# Altium PCB PCB_mini.PcbDoc
Units mm, origin at the board's own origin, x right, y up, seen from the top; angles counter-clockwise.
Board outline 170.49 x 71.77 mm, 2 copper layers (Top Layer, Bottom Layer); 52 components, 61 nets, 200 pads, 16 vias.
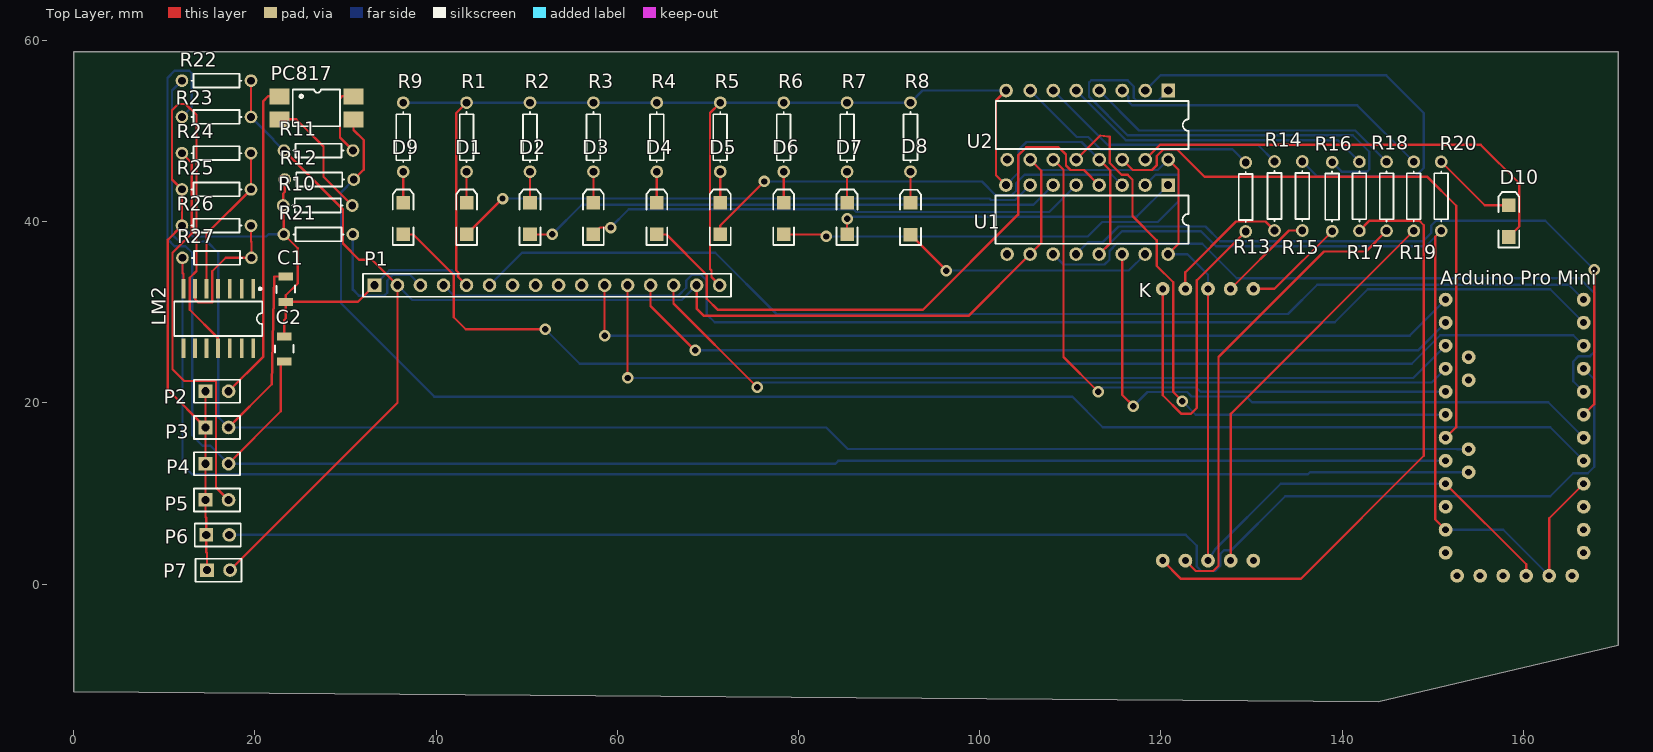
[diagram p0: Top Layer view]
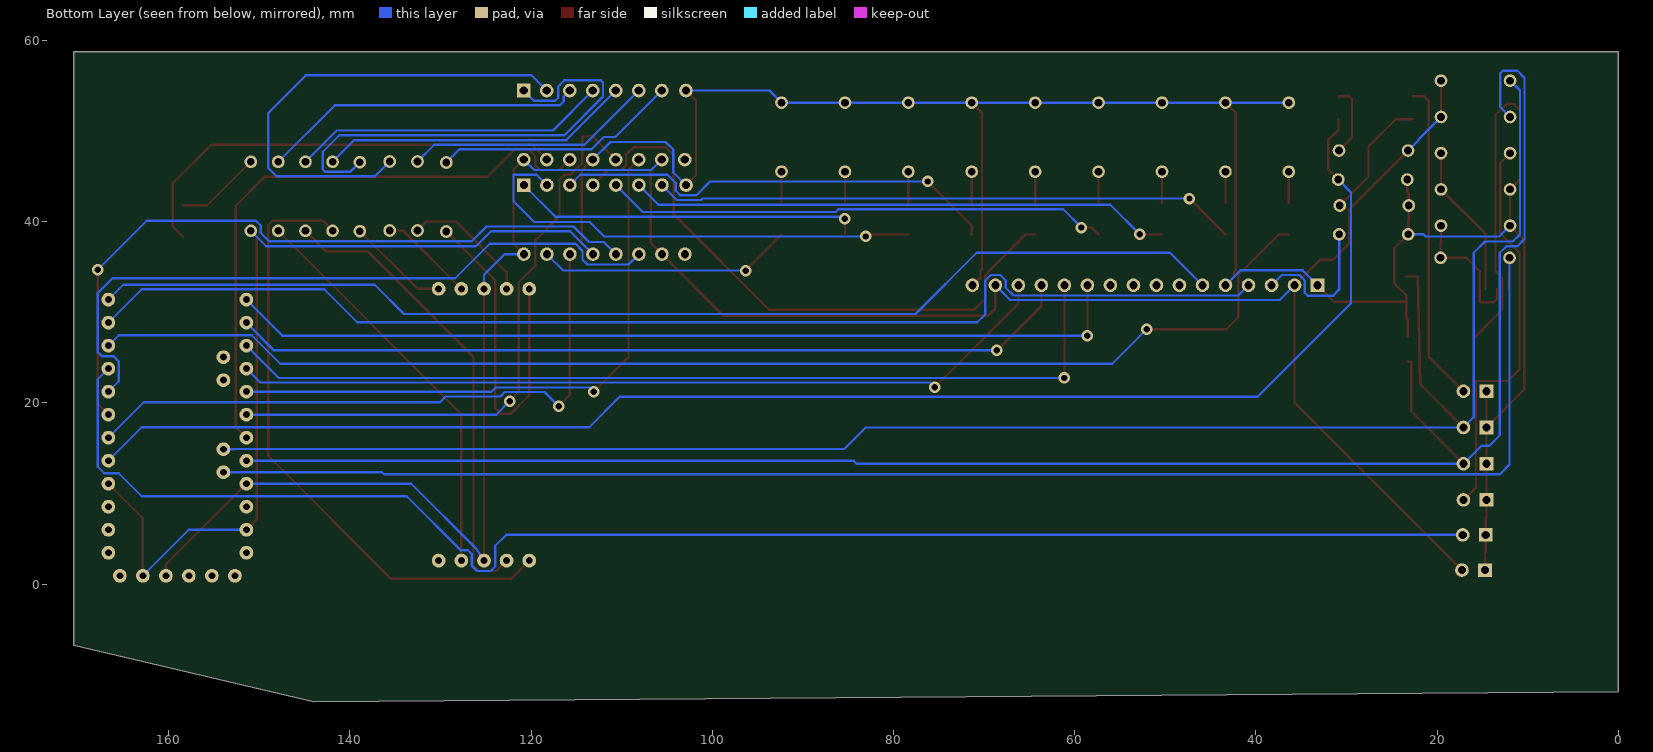
[diagram p1: Bottom Layer view, seen from below]

## Layer stack, top to bottom
Top Solder: solder mask 0.0102, Solder Resist, Dk 3.5
Top Layer: signal copper 0.0356
Dielectric 1: dielectric 0.32, FR-4, Dk 4.8
Bottom Layer: signal copper 0.0356
Bottom Solder: solder mask 0.0102, Solder Resist, Dk 3.5

## Board outline
0,-11.866 0,58.769 170.488,58.769 170.488,-6.739 144,-13

## Design rules (kind name [scope] priority, off if disabled: settings)
Clearance [All] p1: gap=0.254
PolygonConnect [All] p1: connectstyle=Relief reliefconductorwidth=0.254 reliefentries=4 polygonreliefangle="90 Angle" airgapwidth=0.254
RoutingVias [All] p1: holewidth=0.711 width=1.27 viastyle="Through Hole" minholewidth=0.711 minwidth=1.27 maxholewidth=0.711 maxwidth=1.27
SolderMaskExpansion [All] p1: expansion=0.102
Width [All] p1: maxlimit=0.254 minlimit=0.254 preferedwidth=0.254
30 further rules are at their usual default settings.

## Components (designator, comment, footprint, x,y, rotation, side; value= is the part's Value field where it differs from the comment)
"Arduino Pro Mini" "Atmel Atmega328p" ArduinoProMini 166.675,16.167 r90 top
C1 "Cap" "1206 footprint" 23.407,31.55 r90 top
C2 "Cap" "1206 footprint" 23.239,26.981 r270 top
D1 "LED2" 3.2X1.6X1.1 43.362,40.355 r90 top
D2 "LED2" 3.2X1.6X1.1 50.362,40.355 r90 top
D3 "LED2" 3.2X1.6X1.1 57.362,40.355 r90 top
D4 "LED2" 3.2X1.6X1.1 64.362,40.355 r90 top
D5 "LED2" 3.2X1.6X1.1 71.362,40.355 r90 top
D6 "LED2" 3.2X1.6X1.1 78.362,40.355 r90 top
D7 "LED2" 3.2X1.6X1.1 85.362,40.355 r90 top
D8 "LED2" 3.2X1.6X1.1 92.362,40.336 r90 top
D9 "LED2" 3.2X1.6X1.1 36.362,40.355 r90 top
D10 "LED2" 3.2X1.6X1.1 158.41,40.074 r90 top
K "KING_BRIGHT" KNIGHT_BRIGHT 113.208,0.601 r0 top
LM2 "LM324" SOP-14 17.628,29.418 r180 top
P1 "LCD" HDR1X16 33.192,33 r0 top
P2 "Camshaft signal" HDR1X2 14.542,21.297 r0 top
P3 "Oil level" HDR1X2 14.542,17.297 r0 top
P4 "Water heat" HDR1X2 14.542,13.297 r0 top
P5 "Hledslukassi" HDR1X2 14.542,9.297 r0 top
P6 "Gear" HDR1X2 14.63,5.437 r0 top
P7 "Power" HDR1X2 14.709,1.545 r0 top
PC817 "PC817" "PC817 SMT" 22.702,51.309 r0 top
R1 "Res1" AXIAL-0.3 43.362,49.341 r90 top
R2 "Res1" AXIAL-0.3 50.362,49.341 r90 top
R3 "Res1" AXIAL-0.3 57.362,49.341 r90 top
R4 "Res1" AXIAL-0.3 64.362,49.341 r90 top
R5 "Res1" AXIAL-0.3 71.362,49.341 r90 top
R6 "Res1" AXIAL-0.3 78.362,49.341 r90 top
R7 "Res1" AXIAL-0.3 85.362,49.341 r90 top
R8 "R8" AXIAL-0.3 92.362,49.341 r90 top
R9 "Res1" AXIAL-0.3 36.362,49.341 r90 top
R10 "Res1" AXIAL-0.3 26.927,41.803 r0 top
R11 "Res1" AXIAL-0.3 27.011,47.86 r0 top
R12 "Res1" AXIAL-0.3 27.095,44.664 r180 top
R13 "Res1" AXIAL-0.3 129.365,42.739 r270 top
R14 "Res1" AXIAL-0.3 132.542,42.849 r90 top
R15 "Res1" AXIAL-0.3 135.615,42.849 r270 top
R16 "Res1" AXIAL-0.3 138.908,42.776 r270 top
R17 "Res1" AXIAL-0.3 141.915,42.812 r90 top
R18 "Res1" AXIAL-0.3 144.915,42.812 r90 top
R19 "Res1" AXIAL-0.3 147.915,42.812 r90 top
R20 "Res1" AXIAL-0.3 150.942,42.813 r270 top
R21 "Res1" AXIAL-0.3 27,38.614 r0 top
R22 "Res1" AXIAL-0.3 15.751,55.577 r180 top
R23 "Res1" AXIAL-0.3 15.751,51.577 r180 top
R24 "Res1" AXIAL-0.3 15.751,47.577 r0 top
R25 "Res1" AXIAL-0.3 15.751,43.577 r180 top
R26 "Res1" AXIAL-0.3 15.751,39.577 r180 top
R27 "Res1" AXIAL-0.3 15.803,36.02 r180 top
U1 "74HC595N" N14A 113.693,40.363 r180 top
U2 "74HC595N" N14A 113.706,50.809 r180 top

## Footprints (in the part's own frame and the unit in brackets; to place one, negate y for a bottom-side part, rotate by r counter-clockwise, add the part's x,y. Pads: shape width x height; smd on the part's side, far side on the other; paste and mask are expansions set on the pad)
3.2X1.6X1.1 [mm] "SMT LED; 2 Flat Leads"
  rect 1.5x1.5 smd: 1(-1.75,0) 2(1.75,0)
  silkscreen extent -2.9,-1.15 3.2,1.15
"1206 footprint" [mil]
  rect 35x63 smd: 1(-15,0) 2(95,0)
  silkscreen extent 24,-40 56,40, body extent -15,-40 91,40, height 35
ArduinoProMini [mil]
  round 60 hole 30: ADC0(200,600) ADC1(100,600) ADC2(0,600) ADC3(-100,600) ADC4(-50,500) ADC5(-150,500) ADC6(350,500) ADC7(250,500) BLK(-600,50) GND(-600,150) GND(-400,600) GND(-200,0) GRN(-600,550) PB0(500,0) PB1(600,0) PB2(600,600) PB3(500,600) PB4(400,600) PB5(300,600) PC6(-300,600) PC6(-300,0) PD0(-600,350) PD0(-400,0) PD1(-600,450) PD1(-500,0) PD2(-100,0) PD3(0,0) PD4(100,0) PD5(200,0) PD6(300,0) PD7(400,0) RAW(-500,600) Vcc(-600,250) Vcc(-200,600)
AXIAL-0.3 [mm] "Axial Device, Thru-Hole; 2 Leads; 0.3 in Pin Spacing"
  round 1.4 hole 0.85: 1(-3.81,0) 2(3.81,0)
  silkscreen extent -2.77,-0.76 2.77,0.76
HDR1X2 [mm] "Connector; Header; 2 Position"
  rect 1.5x1.5 hole 0.9: 1(0,0)
  round 1.5 hole 0.9: 2(2.54,0)
  silkscreen extent -1.27,-1.27 3.81,1.27
HDR1X16 [mm] "Connector; Header; 16 Position"
  rect 1.5x1.5 hole 0.9: 1(0,0)
  round 1.5 hole 0.9: 2(2.54,0) 3(5.08,0) 4(7.62,0) 5(10.16,0) 6(12.7,0) 7(15.24,0) 8(17.78,0) 9(20.32,0) 10(22.86,0) 11(25.4,0) 12(27.94,0) 13(30.48,0) 14(33.02,0) 15(35.56,0) 16(38.1,0)
  silkscreen extent -1.27,-1.27 39.37,1.27
KNIGHT_BRIGHT [mil]
  round 60 hole 30: 1(275.59,78.74) 2(374.02,78.74) 3(472.44,78.74) 4(570.87,78.74) 5(669.29,78.74) 6(275.59,1259.84) 7(374.02,1259.84) 8(472.44,1259.84) 9(570.87,1259.84) 10(669.29,1259.84)
N14A [mm]
  rect 1.5x1.5 hole 0.9: 1(-7.112,-3.683)
  round 1.5 hole 0.9: 2(-4.572,-3.683) 3(-2.032,-3.683) 4(0.508,-3.683) 5(3.048,-3.683) 6(5.588,-3.683) 7(8.128,-3.683) 8(10.795,-3.683) 9(10.668,3.937) 10(8.128,3.937) 11(5.588,3.937) 12(3.048,3.937) 13(0.508,3.937) 14(-2.032,3.937) 15(-4.572,3.937) 16(-7.112,3.937)
  silkscreen extent -9.34,-2.52 11.94,2.78
"PC817 SMT" [mil]
  rect 87x70 smd: 1(0,100) 2(0,0) 3(322,0) 4(322,100)
  silkscreen extent 58,-30 263,130, body extent -37,-40 357,140, height 150
SOP-14 [mm]
  rect 0.406x2.15 smd: 1(-2.199,-3.173) 2(-0.899,-3.173) 3(0.401,-3.173) 4(1.701,-3.173) 5(2.971,-3.173) 6(4.241,-3.173) 7(5.511,-3.173) 8(5.511,3.377) 9(4.241,3.377) 10(2.971,3.377) 11(1.701,3.377) 12(0.401,3.377) 13(-0.899,3.377) 14(-2.199,3.377)
  silkscreen extent -3.17,-3.3 6.53,2.03, body extent -3.39,-3.58 6.81,3.72, height 1.1

## Part data
"Arduino Pro Mini": library part ArduinoProMini
D1 D2 D3 D4 D5 D6 D7 D8 D9 D10: "Typical RED, GREEN, YELLOW, AMBER GaAs LED"
P1: library part "Header 16", "Header, 16-Pin"
P2 P3 P4 P5 P6 P7: library part "Header 2", "Header, 2-Pin"
R1 R2 R3 R4 R5 R6 R7 R9 R10 R11 R12 R13 R14 R15 R16 R17 R18 R19 R20 R21 R22 R23 R24 R25 R26 R27: "Resistor"
R8: library part Res1, "Resistor"
U1 U2: library part SN74LS06N

## Via types
v1: diameter 1.27, hole 0.711, Top Layer to Bottom Layer, 16 vias

## Nets (pads, with @x,y where several pads share a name; then routed paths per layer and width w, separated by ;. In a path a pad name is that pad's centre, name@x,y a point inside that pad or via, vN(x,y) a via of type N, cw(c..) or ccw(c..) an arc to the next point about the centre after c; other vN are vias at no path point)
3V????: LM2.4
GND: "Arduino Pro Mini.GND" C1.1 C2.1 LM2.11 P1.1 P1.5 P1.16 P2.1 P3.1 P4.1 P5.1 P6.1 P7.1 R1.2 R2.2 R3.2 R4.2 R5.2 R6.2 R7.2 R8.2 R9.2 R10.1 R12.2 R20.2 R21.1 R25.2 R26.2 U1.8 U1.13 U2.8 U2.13 | length 386.9
  Top Layer w0.254: P2.1 P3.1 ; P7.1 14.709,3.429 14.63,3.508 P6.1 14.63,7.315 14.542,7.403 P5.1 P4.1 P3.1 ; LM2.11 15.927,27.177 12.802,30.302 12.802,33.833 13.538,34.569 13.538,51.816 12.344,53.01 11.532,53.01 10.846,52.324 10.846,44.672 R25.2 R26.2 10.389,38.025 10.389,21.451 P3.1 ; C2.1 23.239,29.159 23.407,29.327 C1.1 ; R12.2 23.285,43.297 23.117,43.129 R10.1 23.117,40.23 23.19,40.157 R21.1 24.714,37.09 24.714,33.198 23.407,31.89 C1.1 ; P1.1 31.361,31.169 C1.1 ; P1.5 42.451,33.901 42.451,34.403 42.215,34.639 42.215,52.004 R1.2 ; P1.16 70.391,33.901 70.391,34.639 70.231,34.799 70.231,52.02 R5.2 ; U1.8 101.803,45.141 101.803,53.383 U2.8 ; U1.13 114.427,37.668 114.427,45.643 U2.13 ; R20.2 150.292,38.353 150.292,7.151 151.435,6.007 ; 162.865,0.927 162.865,7.277 166.675,11.087
  Bottom Layer w0.254: R26.2 13.139,38.379 21.254,38.379 21.488,38.614 R21.1 ; P1.1 34.831,34.639 41.713,34.639 P1.5 ; R9.2 R1.2 R2.2 R3.2 R4.2 R5.2 R6.2 R7.2 R8.2 93.703,54.492 U2.8 ; U1.8 104.318,45.465 104.318,47.981 105.156,48.819 111.251,48.819 U2.13 ; U1.13 115.723,38.964 124.435,38.964 126.086,37.313 149.252,37.313 R20.2 ; 151.435,6.007 157.785,6.007 162.865,0.927
"INPUT 1": "Arduino Pro Mini.PD2" PC817.3 R12.1 | length 166.2
  Top Layer w0.254: PC817.3 30.881,50.14 32.004,49.017 32.004,45.762 R12.1
  Bottom Layer w0.254: R12.1 29.489,43.248 29.489,31.013 39.799,20.703 110.208,20.703 113.589,17.323 162.98,17.323 166.675,13.627
"INPUT 2": "Arduino Pro Mini.ADC3" C2.2 P4.2 R23.2 | length 203.5
  Top Layer w0.254: P4.2 22.86,19.075 22.86,24.568 C2.2
  Bottom Layer w0.254: R23.2 13.03,52.666 13.03,56.388 12.751,56.667 11.125,56.667 10.338,55.88 10.338,38.1 11.125,37.313 12.344,37.313 13.081,36.576 13.081,16.434 14.224,15.291 15.088,15.291 P4.2 84.074,13.297 84.404,13.627 151.435,13.627
"INPUT 3": "Arduino Pro Mini.ADC4" C1.2 P3.2 R22.2 | length 200.9
  Top Layer w0.254: P3.2 21.844,22.059 22.123,33.963 C1.2
  Bottom Layer w0.254: R22.2 10.846,54.482 10.846,38.608 11.633,37.821 14.694,37.821 15.939,36.576 15.939,18.44 P3.2 83.058,17.297 85.445,14.91 152.679,14.91 152.692,14.897 153.975,14.897
"INPUT 4": "Arduino Pro Mini.ADC5" LM2.7 R27.2 | length 168.8
  Top Layer w0.254: R27.2 11.993,34.363 12.117,34.239 LM2.7
  Bottom Layer w0.254: R27.2 11.993,13.203 13.056,12.141 136.246,12.141 136.462,12.357 153.975,12.357
"INPUT 5": "Arduino Pro Mini.PD6" P6.2 | length 170.5
  Bottom Layer w0.254: P6.2 17.17,5.461 122.733,5.461 123.952,4.242 123.952,1.956 124.46,1.448 125.984,1.448 126.543,2.007 126.543,3.302 127,3.759 127.787,3.759 133.731,9.703 162.992,9.703 165.532,12.243 167.132,12.243 167.843,12.954 167.843,22.619 166.675,23.787
"NetArduino Pro Mini_ADC0": "Arduino Pro Mini.ADC0" U2.11 | length 66.4
  Top Layer w0.254: U2.11 109.245,45.745 109.245,25.07 v1(113.081,21.234)
  Bottom Layer w0.254: v1(113.081,21.234) 113.563,21.717 123.901,21.717 124.371,21.247 151.435,21.247
"NetArduino Pro Mini_ADC1": "Arduino Pro Mini.ADC1" U2.12 | length 67.4
  Top Layer w0.254: U2.12 113.317,49.53 114.351,49.374 114.351,46.482 115.646,45.187 116.332,45.187 116.865,44.653 116.865,40.64 119.558,37.948 119.558,35.128 121.361,33.325 121.361,21.209 v1(122.377,20.193)
  Bottom Layer w0.254: v1(122.377,20.193) 123.863,18.707 151.435,18.707
"NetArduino Pro Mini_ADC2": "Arduino Pro Mini.ADC2" U2.14 | length 67.6
  Top Layer w0.254: U2.14 116.89,45.72 119.024,45.72 119.532,46.228 119.532,47.244 120.291,48.003 121.796,48.003 124.841,44.958 149.428,44.958 152.603,41.783 152.603,17.335 151.435,16.167
"NetArduino Pro Mini_PB0": "Arduino Pro Mini.PB0" P1.4 | length 135.2
  Bottom Layer w0.254: P1.4 41.943,31.869 66.769,31.869 67.615,32.715 67.615,33.528 68.224,34.138 69.274,34.138 69.883,33.528 69.883,29.769 70.747,28.905 139.192,28.905 142.837,32.55 162.992,32.55 166.675,28.867
"NetArduino Pro Mini_PB1": "Arduino Pro Mini.PB1" P1.6 | length 127.1
  Bottom Layer w0.254: P1.6 49.471,36.579 70.802,36.579 77.561,29.82 134.036,29.82 137.274,33.058 165.024,33.058 166.675,31.407
"NetArduino Pro Mini_PB2": "Arduino Pro Mini.PB2" P1.11 | length 100.1
  Top Layer w0.254: v1(58.592,27.432) P1.11
  Bottom Layer w0.254: v1(58.592,27.432) 147.46,27.432 151.435,31.407
"NetArduino Pro Mini_PB3": "Arduino Pro Mini.PB3" P1.13 | length 93.3
  Top Layer w0.254: P1.13 63.672,30.714 v1(68.58,25.806)
  Bottom Layer w0.254: v1(68.58,25.806) 148.375,25.806 151.435,28.867
"NetArduino Pro Mini_PB4": "Arduino Pro Mini.PB4" P1.12 | length 102
  Top Layer w0.254: v1(61.132,22.758) P1.12
  Bottom Layer w0.254: v1(61.132,22.758) 147.867,22.758 151.435,26.327
"NetArduino Pro Mini_PB5": "Arduino Pro Mini.PB5" P1.14 | length 91.9
  Top Layer w0.254: P1.14 66.212,30.968 v1(75.438,21.742)
  Bottom Layer w0.254: v1(75.438,21.742) 75.946,22.25 149.899,22.25 151.435,23.787
"NetArduino Pro Mini_PD3": "Arduino Pro Mini.PD3" U1.14 | length 69.7
  Top Layer w0.254: U1.14 115.725,20.901 v1(116.967,19.66)
  Bottom Layer w0.254: v1(116.967,19.66) 118.516,21.209 122.911,21.209 123.393,20.726 129.438,20.726 130.073,20.091 162.751,20.091 166.675,16.167
"NetArduino Pro Mini_PD4": "Arduino Pro Mini.PD4" U1.12 | length 79.3
  Top Layer w0.254: 166.675,18.707 167.843,19.875 v1(167.843,34.696)
  Bottom Layer w0.254: U1.12 111.989,37.77 113.614,37.77 115.316,39.472 124.943,39.472 126.568,37.846 148.946,37.846 149.86,38.76 149.86,39.599 150.368,40.107 162.433,40.107 v1(167.843,34.696)
"NetArduino Pro Mini_PD5": "Arduino Pro Mini.PD5" U1.11 | length 77
  Bottom Layer w0.254: U1.11 109.251,35.281 113.792,35.281 114.325,35.814 114.325,36.779 115.113,37.567 124.562,37.567 128.372,33.757 166.218,33.757 167.843,32.131 167.843,25.629 167.386,25.171 166.116,25.171 165.532,24.587 165.532,22.391 166.675,21.247
"NetArduino Pro Mini_PD7": "Arduino Pro Mini.PD7" D9.1 | length 140.7
  Top Layer w0.254: D9.1 37.469,38.605 41.943,34.131 41.943,29.464 43.264,28.143 v1(52.045,28.143)
  Bottom Layer w0.254: v1(52.045,28.143) 55.855,24.333 147.701,24.333 150.851,27.483 165.52,27.483 166.675,26.327
NetD1_1: D1.1 U1.7 | length 64.6
  Top Layer w0.254: D1.1 v1(47.328,42.57)
  Bottom Layer w0.254: v1(47.328,42.57) 101.096,42.57 101.259,42.407 103.926,42.407 U1.7
NetD1_2: D1.2 R1.1 | length 3.4
  Top Layer w0.254: D1.2 R1.1
NetD2_1: D2.1 U1.6 | length 60
  Top Layer w0.254: D2.1 v1(52.804,38.605)
  Bottom Layer w0.254: v1(52.804,38.605) 56.083,41.885 105.944,41.885 U1.6
NetD2_2: D2.2 R2.1 | length 3.4
  Top Layer w0.254: D2.2 R2.1
NetD3_1: D3.1 U1.5 | length 55.8
  Top Layer w0.254: D3.1 58.127,39.37 v1(59.258,39.37)
  Bottom Layer w0.254: v1(59.258,39.37) 61.265,41.377 86.081,41.377 86.385,41.072 107.671,41.072 U1.5
NetD3_2: D3.2 R3.1 | length 3.4
  Top Layer w0.254: D3.2 R3.1
NetD4_1: D4.1 U1.4 | length 67.5
  Top Layer w0.254: D4.1 65.416,38.605 69.883,34.138 69.883,31.496 71.103,30.277 93.726,30.277 104.242,40.792 104.242,47.32 105.156,48.235 108.712,48.235 109.525,47.422 109.525,46.228 110.033,45.72 111.511,45.72 U1.4
NetD4_2: D4.2 R4.1 | length 3.4
  Top Layer w0.254: D4.2 R4.1
NetD5_1: D5.1 U1.3 | length 49.9
  Top Layer w0.254: D5.1 71.362,39.587 v1(76.225,44.45)
  Bottom Layer w0.254: v1(76.225,44.45) 100.243,44.45 101.778,42.915 103.519,42.915 104.038,43.434 104.038,44.272 104.953,45.187 114.585,45.187 U1.3
NetD5_2: D5.2 R5.1 | length 3.4
  Top Layer w0.254: D5.2 R5.1
NetD6_1: D6.1 U1.2 | length 52.4
  Top Layer w0.254: D6.1 82.832,38.605 v1(83.058,38.379)
  Bottom Layer w0.254: v1(83.058,38.379) 111.938,38.379 113.538,39.98 119.659,39.98 121.945,42.266 121.945,45.187 119.406,45.187 U1.2
NetD6_2: D6.2 R6.1 | length 3.4
  Top Layer w0.254: D6.2 R6.1
NetD7_1: D7.1 U1.1 | length 38.7
  Top Layer w0.254: D7.1 85.362,40.354 v1(85.369,40.361)
  Bottom Layer w0.254: v1(85.369,40.361) 85.573,40.564 117.323,40.564 U1.1
NetD7_2: D7.2 R7.1 | length 3.4
  Top Layer w0.254: D7.2 R7.1
NetD8_1: D8.1 U1.15 | length 28.3
  Top Layer w0.254: D8.1 v1(96.328,34.62)
  Bottom Layer w0.254: v1(96.328,34.62) 116.46,34.62 U1.15
NetD8_2: D8.2 R8.1 | length 3.4
  Top Layer w0.254: D8.2 92.362,43.79 R8.1
NetD9_2: D9.2 R9.1 | length 3.4
  Top Layer w0.254: D9.2 R9.1
NetD10_2: D10.2 R20.1 | length 9.5
  Top Layer w0.254: R20.1 155.741,41.824 D10.2
NetK_1: K.1 R17.1 | length 68.5
  Top Layer w0.254: K.1 122.225,0.584 135.433,0.584 149.022,14.173 149.022,39.624 148.514,40.132 143.045,40.132 R17.1
NetK_2: K.2 R18.1 | length 51.7
  Top Layer w0.254: K.2 123.862,1.448 125.781,1.448 126.365,2.032 126.365,25.07 138.024,36.728 142.641,36.728 R18.1
NetK_4: K.4 R19.1 | length 44.8
  Top Layer w0.254: K.4 127.708,18.795 R19.1
NetK_6: K.6 R13.2 | length 38.3
  Top Layer w0.254: K.6 120.208,20.863 122.276,18.796 123.292,18.796 123.977,19.482 123.977,33.541 R13.2
NetK_7: K.7 R14.1 | length 14.4
  Top Layer w0.254: K.7 122.708,34.443 128.295,40.03 131.551,40.03 R14.1
NetK_9: K.9 R15.2 | length 10.6
  Top Layer w0.254: K.9 134.146,39.039 R15.2
NetK_10: K.10 R16.2 | length 11.3
  Top Layer w0.254: K.10 132.543,32.601 R16.2
NetLM2_5: LM2.5 R24.2 R25.1 | length 17
  Top Layer w0.254: LM2.5 14.657,38.673 R25.1 R24.2
NetLM2_6: LM2.6 R26.1 R27.1 | length 15.1
  Top Layer w0.254: LM2.6 13.387,31.444 13.716,31.115 15.291,31.115 15.291,34.544 16.767,36.02 R27.1 19.613,37.77 19.561,37.822 R26.1
NetP1_3: P1.3 R21.2 | length 16.1
  Bottom Layer w0.254: R21.2 30.81,32.512 31.471,31.852 34.29,31.852 34.595,32.156 34.595,33.528 35.198,34.131 37.141,34.131 P1.3
NetP2_2: P2.2 PC817.1 | length 35.6
  Top Layer w0.254: P2.2 20.93,25.145 20.93,53.34 21.439,53.849 PC817.1
NetP5_2: P5.2 R24.1 | length 44.2
  Top Layer w0.254: R24.1 13.03,46.488 13.03,38.71 10.897,36.576 10.897,23.724 12.192,22.428 15.697,22.428 15.697,10.682 P5.2
NetPC817_2: PC817.2 R10.2 | length 13.9
  Top Layer w0.254: PC817.2 24.562,51.309 27.559,48.312 27.559,44.982 R10.2
NetPC817_4: PC817.4 R11.2 | length 7.9
  Top Layer w0.254: R11.2 29.388,49.294 29.388,53.594 29.643,53.849 PC817.4
NetR13_1: R13.1 U2.7 | length 27.1
  Bottom Layer w0.254: U2.7 110.718,49.352 111.989,49.352 113.338,48.003 127.912,48.003 R13.1
NetR14_2: R14.2 U2.6 | length 27.7
  Bottom Layer w0.254: U2.6 114.099,48.511 130.69,48.511 R14.2
NetR15_1: R15.1 U2.2 | length 53.7
  Bottom Layer w0.254: U2.2 119.962,56.175 144.866,56.175 149.022,52.019 149.022,45.949 148.107,45.033 137.241,45.033 R15.1
NetR16_1: R16.1 U2.1 | length 52.6
  Bottom Layer w0.254: U2.1 119.687,53.361 117.348,53.361 117.018,53.691 117.018,54.94 116.332,55.626 112.319,55.626 112.065,55.372 112.065,53.823 116.332,49.555 141.173,49.555 143.002,47.727 143.002,45.795 142.748,45.541 139.952,45.541 R16.1
NetR17_2: R17.2 U2.5 | length 34.5
  Bottom Layer w0.254: U2.5 116.131,49.019 139.519,49.019 R17.2
NetR18_2: R18.2 U2.4 | length 35
  Bottom Layer w0.254: U2.4 117.601,50.089 141.449,50.089 R18.2
NetR19_2: R19.2 U2.3 | length 35.8
  Bottom Layer w0.254: U2.3 116.4,53.83 116.4,53.292 116.84,52.853 141.685,52.853 R19.2
VCC: "Arduino Pro Mini.Vcc" K.3 K.8 P1.2 P1.15 P7.2 R11.1 R22.1 R23.1 U1.10 U1.16 U2.10 U2.16 | length 265.8
  Top Layer w0.254: P7.2 35.732,20.028 P1.2 32.918,35.814 31.496,35.814 29.718,37.592 29.718,41.344 R11.1 ; R23.1 R22.1 ; P1.15 68.752,30.42 69.556,29.616 98.756,29.616 U1.10 106.807,37.668 106.807,45.643 U2.10 ; U1.16 121.945,37.566 121.945,45.745 U2.16 ; K.3 K.8 ; 151.435,11.087 160.325,2.197 160.325,0.927
  Bottom Layer w0.254: R23.1 22.047,49.091 22.047,49.014 R11.1 ; P1.2 37.371,31.361 67.113,31.361 P1.15 ; U2.10 106.73,45.72 119.667,45.72 U2.16 ; U1.16 122.936,36.426 125.208,34.154 K.8 ; K.3 125.973,3.818 133.243,11.087 151.435,11.087
"WARNING LIGHT": D10.1 U2.15 | length 50.1
  Top Layer w0.254: U2.15 119.917,48.511 155.299,48.511 159.563,44.247 159.563,39.477 D10.1
pads on no net: "Arduino Pro Mini.ADC6" "Arduino Pro Mini.ADC7" "Arduino Pro Mini.BLK" "Arduino Pro Mini.GRN" "Arduino Pro Mini.PC6" "Arduino Pro Mini.PD0" "Arduino Pro Mini.PD1" "Arduino Pro Mini.RAW" K.5 LM2.1 LM2.2 LM2.3 LM2.8 LM2.9 LM2.10 LM2.12 LM2.13 LM2.14 P1.7 P1.8 P1.9 P1.10 U1.9 U2.9